# EAGLE board simple-hat (EAGLE 6.6.0)

Size 100 x 80 mm. Coordinates in mm from the lower left corner, seen from the top.
Outline: 0,0 100,0 100,80 0,80 0,0
Copper layers (1*16): Top 0.035mm / dielectric 1.5mm / Bottom 0.035mm
Design rules "default": minimum track width 10mil, minimum drill 24mil, track to track 8mil, track to pad 8mil, pad to pad 8mil, via to via 8mil, smd to smd 8mil, copper to edge 40mil, drill to drill 8mil, minimum pad ring 10mil, minimum via ring 8mil, stop-mask expansion 4mil, vias tented up to drill 0mil, thermal gap 10mil
Net classes: 0 default: width 0.61 mm, clearance 0.508 mm; 1 Power: width 0.914 mm, clearance 0.508 mm; 2 GND: width 0.813 mm, clearance 0.508 mm

## Footprints (pad centres in the part's own frame; a part is rotated, then mirrored left to right if it is on the bottom)
E2-5 = drill 0.813 pad 1.27: + -1.016,0 | drill 0.813 pad 1.27 octagon: - 1.016,0
C025-025X050 = drill 0.813 octagon: 1 -1.27,0; 2 1.27,0
E5-10,5 = drill 1.016 pad 2.54: + -2.54,0 | drill 1.016 pad 2.54 octagon: - 2.54,0
SOCKET-20 = drill 0.813 long: 1 -11.43,-3.81; 2 -8.89,-3.81; 3 -6.35,-3.81; 4 -3.81,-3.81; 5 -1.27,-3.81; 6 1.27,-3.81; 7 3.81,-3.81; 8 6.35,-3.81; 9 8.89,-3.81; 10 11.43,-3.81; 11 11.43,3.81; 12 8.89,3.81; 13 6.35,3.81; 14 3.81,3.81; 15 1.27,3.81; 16 -1.27,3.81; 17 -3.81,3.81; 18 -6.35,3.81; 19 -8.89,3.81; 20 -11.43,3.81
DIL28-4 = drill 0.813 long: 1 -16.51,-5.08; 2 -13.97,-5.08; 3 -11.43,-5.08; 4 -8.89,-5.08; 5 -6.35,-5.08; 6 -3.81,-5.08; 7 -1.27,-5.08; 8 1.27,-5.08; 9 3.81,-5.08; 10 6.35,-5.08; 11 8.89,-5.08; 12 11.43,-5.08; 13 13.97,-5.08; 14 16.51,-5.08; 15 16.51,5.08; 16 13.97,5.08; 17 11.43,5.08; 18 8.89,5.08; 19 6.35,5.08; 20 3.81,5.08; 21 1.27,5.08; 22 -1.27,5.08; 23 -3.81,5.08; 24 -6.35,5.08; 25 -8.89,5.08; 26 -11.43,5.08; 27 -13.97,5.08; 28 -16.51,5.08
1X02 = drill 1.016 long: 1 -1.27,0; 2 1.27,0
Q = drill 0.61 long: 1 -2.54,-7.62; 2 2.54,-7.62
TO92-EBC = drill 0.813 long: B 0,-1.27; C -2.54,-1.27; E 2.54,-1.27
0207/7 = drill 0.813 octagon: 1 -3.81,0; 2 3.81,0
B25P = drill 0.813 octagon: A -2.54,0; E 2.54,0; S 0,2.54
SMS-1308MS-2-R = smd 1.4 x 2.2: + -5.375,-4.35; - 5.375,-4.35; M1 -5.375,4.35; M2 5.375,4.35
MA20-2 = drill 1.016 octagon: 1 -24.13,-1.27; 2 -24.13,1.27; 3 -21.59,-1.27; 4 -21.59,1.27; 5 -19.05,-1.27; 6 -19.05,1.27; 7 -16.51,-1.27; 8 -16.51,1.27; 9 -13.97,-1.27; 10 -13.97,1.27; 11 -11.43,-1.27; 12 -11.43,1.27; 13 -8.89,-1.27; 14 -8.89,1.27; 15 -6.35,-1.27; 16 -6.35,1.27; 17 -3.81,-1.27; 18 -3.81,1.27; 19 -1.27,-1.27; 20 -1.27,1.27; 21 1.27,-1.27; 22 1.27,1.27; 23 3.81,-1.27; 24 3.81,1.27; 25 6.35,-1.27; 26 6.35,1.27; 27 8.89,-1.27; 28 8.89,1.27; 29 11.43,-1.27; 30 11.43,1.27; 31 13.97,-1.27; 32 13.97,1.27; 33 16.51,-1.27; 34 16.51,1.27; 35 19.05,-1.27; 36 19.05,1.27; 37 21.59,-1.27; 38 21.59,1.27; 39 24.13,-1.27; 40 24.13,1.27
FE08W = drill 0.813 long: 1 -8.89,0; 2 -6.35,0; 3 -3.81,0; 4 -1.27,0; 5 1.27,0; 6 3.81,0; 7 6.35,0; 8 8.89,0

## Placement (x,y rotation side)
C1  10uF  [E2-5]  2.54,66.04 0 top
C2  0.1uF  [C025-025X050]  2.54,60.96 0 top
C3  0.1uF  [C025-025X050]  10.16,66.04 0 top
C4  10uF  [E2-5]  3.81,74.93 0 top
C5  0.1uF  [C025-025X050]  12.7,30.48 0 top
C6  0.1uF  [C025-025X050]  17.78,67.31 0 top
C7  1uF  [E5-10,5]  39.37,13.97 0 top
C8  0.1uF  [C025-025X050]  64.77,64.77 0 top
C9  0.1uF  [C025-025X050]  49.53,50.8 0 top
C11  0.022uF  [C025-025X050]  2.54,71.12 0 top
IC1  FXMA108  [SOCKET-20]  38.1,54.61 270 top
IC2  ATP3012  [DIL28-4]  63.5,48.26 270 top
JP1  FAN  [1X02]  10.16,80.01 0 top
Q1  16MHz  [Q]  48.26,36.83 180 top
Q4  2SA1015  [TO92-EBC]  33.02,24.13 0 top
R1  470  [0207/7]  22.86,36.83 180 top
R2  2k2  [0207/7]  19.05,25.4 0 top
R3  100k  [0207/7]  54.61,34.29 0 top
R5  50k  [B25P]  34.29,33.02 0 top
SP1  8Ohm-1W-Speaker  [SMS-1308MS-2-R]  54.61,11.43 180 top
SV1  RPi-GPIO  [MA20-2]  31.75,72.39 0 top
SV2  TPA2006  [FE08W]  49.53,21.59 0 top

## Library data of the parts
C1-C9 C11 R1-R3 = resistor
IC1 IC2 = ic-package
JP1 = pinhead
Q1 = special
Q4 = transistor-npn
R5 = pot
SP1 = speaker
SV1 = con-lstb; OC_FARNELL: unknown; OC_NEWARK: unknown
SV2 = con-lsta; OC_FARNELL: unknown; OC_NEWARK: unknown

## Nets
+3V3: C1.+ C6.1 IC1.1 SV1.1
+5V: C2.1 C7.+ IC1.20 IC2.1 IC2.4 IC2.5 IC2.7 IC2.11 IC2.12 IC2.14 IC2.20 Q4.C SV2.4
+5V_02 [Power]: C3.1 C4.+ JP1.1 SV1.2 SV1.4
GND [GND]: C1.- C2.2 C3.2 C4.- C5.2 C6.2 C7.- C8.2 C9.2 C11.2 IC1.10 IC2.8 IC2.22 JP1.2 R5.A SV1.6 SV1.9 SV1.14 SV1.20 SV1.25 SV1.30 SV1.34 SV1.39 SV2.3 SV2.5 SV2.7
IN-: R5.S SV2.6
N$1: IC2.13 R3.1
N$2: C9.1 IC2.10 Q1.2
N$3: C8.1 IC2.9 Q1.1
N$4: Q4.B R3.2
N$5: C5.1 R1.2 R2.1
N$6: IC2.15 R1.1
N$7: C11.1 R2.2 R5.E
OUT+: SP1.- SV2.1
OUT-: SP1.+ SV2.2
RX: IC1.19 IC2.2
RXD: IC1.3 SV1.10
SD#: Q4.E SV2.8
TX: IC1.18 IC2.3
TXD: IC1.2 SV1.8

## Tracks (layer width: path | path; a pad name or v marks a point on that pad's centre or on a via)
+3V3  (3 unrouted)
+5V  (12 unrouted)
+5V_02  (4 unrouted)
GND  (25 unrouted)
IN-  (1 unrouted)
N$1  (1 unrouted)
N$2  (2 unrouted)
N$3  (2 unrouted)
N$4  (1 unrouted)
N$5  (2 unrouted)
N$6  (1 unrouted)
N$7  (2 unrouted)
OUT+  (1 unrouted)
OUT-  (1 unrouted)
RX  (1 unrouted)
RXD  (1 unrouted)
SD#  (1 unrouted)
TX  (1 unrouted)
TXD  (1 unrouted)